# Altium PCB Copy of LED_EN_Kian_V2_F1.PcbDoc
Units mil, origin at the board's own origin, x right, y up, seen from the top; angles counter-clockwise.
Board outline 1770 x 2960 mil, 2 copper layers (Top Layer, Bottom Layer); 36 components, 17 nets, 89 pads, 125 vias.
Unrouted connection lines stored in the file: 5.
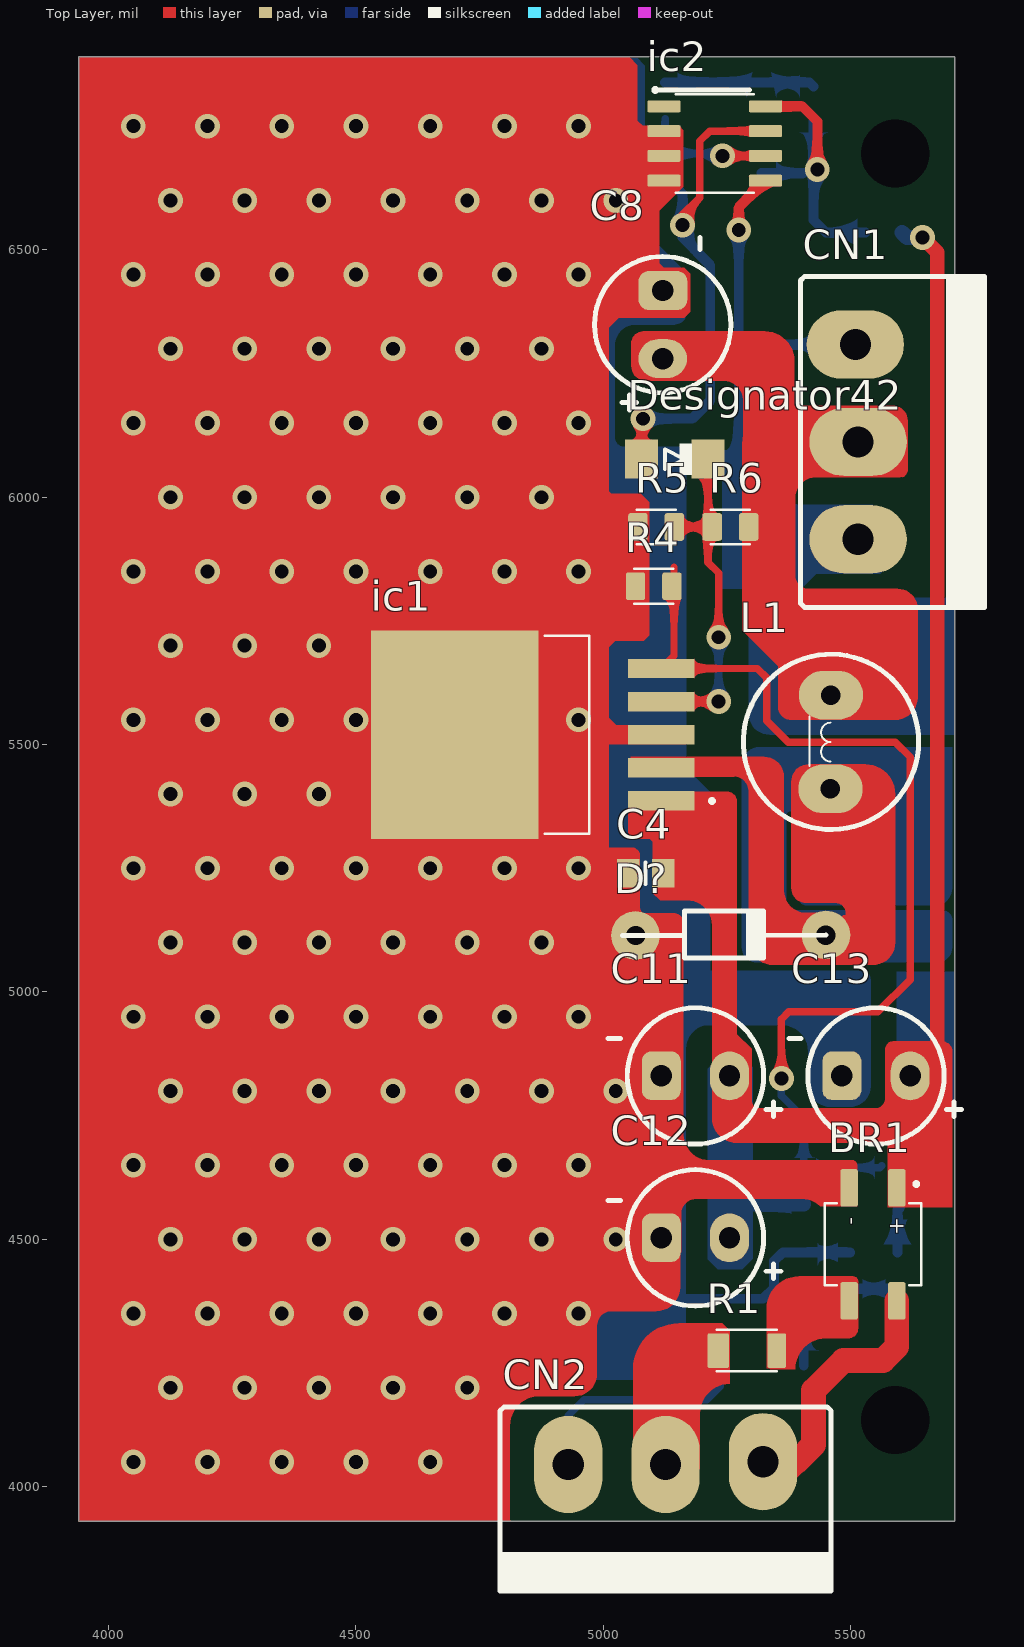
[diagram p0: Top Layer view]
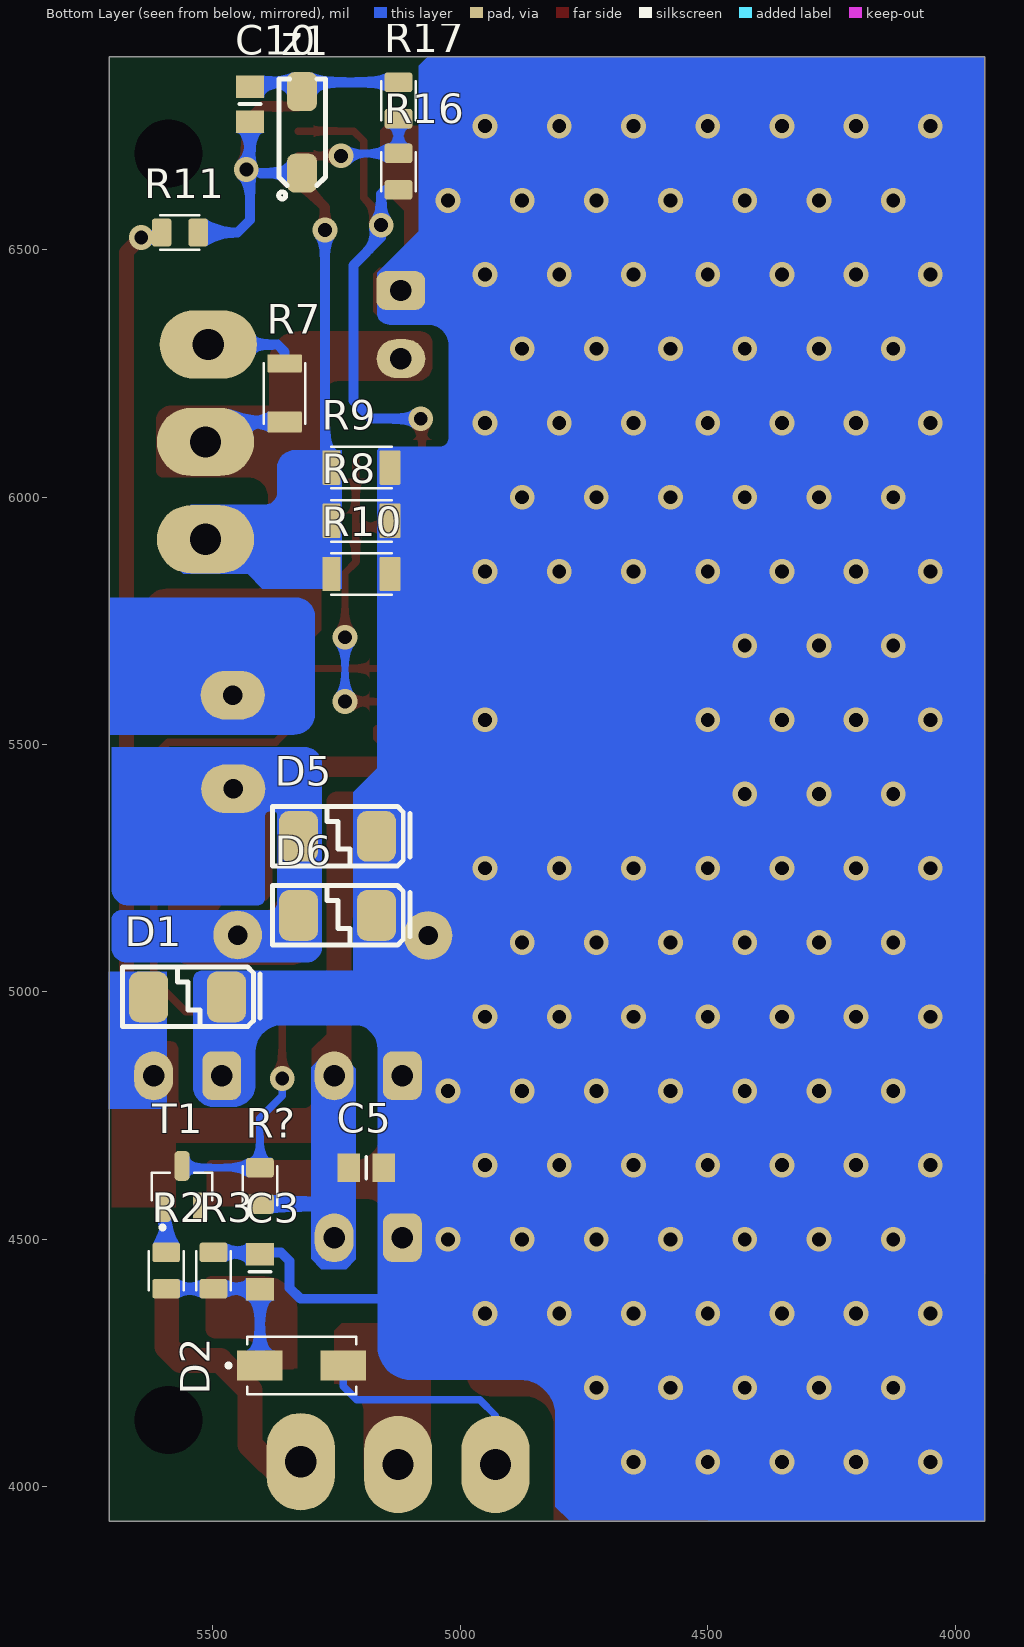
[diagram p1: Bottom Layer view, seen from below]

## Layer stack, top to bottom
Top Solder: solder mask 0.4, Solder Resist, Dk 3.5
Top Layer: signal copper 1.4
Dielectric 1: dielectric 12.6, FR-4, Dk 4.8
Bottom Layer: signal copper 1.4
Bottom Solder: solder mask 0.4, Solder Resist, Dk 3.5

## Board outline
3940,3930 3940,6890 5710,6890 5710,3930

## Design rules (kind name [scope] priority, off if disabled: settings)
Clearance POLY [InNamedPolygon('PG')] p1: gap=50 ignorepadtopadclearanceinfootprint=FALSE
Clearance Clearance_1 [All] p2: gap=10 ignorepadtopadclearanceinfootprint=FALSE except(0: Arc-Hole Track-Hole SMDPad-Hole THPad-Hole Via-Hole Fill-Hole Poly-Hole Region-Hole Text-Hole)
ComponentClearance [All] p1: gap=0 collisioncheckmode=3 verticalgap=0 showdistances=FALSE
PolygonConnect [All] p1: connectstyle=Direct reliefconductorwidth=10 reliefentries=4 polygonreliefangle="90 Angle" airgapwidth=10
RoutingVias [All] p1: holewidth=28 width=50 viastyle="Through Hole" minholewidth=28 minwidth=50 maxholewidth=28 maxwidth=50
SolderMaskExpansion [All] p1: expansion=4
Width [All] p1: maxlimit=196.85 minlimit=10 preferedwidth=10 minimp=50.000000 maximp=50.000000 favimp=50.000000
29 further rules are at their usual default settings.

## Classes and differential pairs
component class U_LED_EN_Kian_V2_SWITCHING: BR1 C3 C4 C5 C8 C10 D1 D2 D? ic1 ic2 L1 R1 R2 R3 R4 R5 R6 R7 R8 R9 R16 R17 R? T1 z1
component class U_LED_EN_Kian_V2_CONECTOR: CN1 CN2

## Components (designator, comment, footprint, x,y, rotation, side; value= is the part's Value field where it differs from the comment)
BR1 "mb6s" MB6S/SMD 5520,4490 r90 top
C3 "1UF" CAP-0805 5404.15,4470.99 r270 bottom
C4 "100nF" CAP-0805 5049.01,5240.85 r0 top
C5 "100nF" CAP-0805 5153.79,4644.15 r0 bottom
C8 "1000uF-10V" CAP-EL-P3.5MM 5120,6417.8 r270 top
C10 "100nF" CAP-0805 5424.15,6830.99 r270 bottom
C11 "1000uF-10V" CAP-EL-P3.5MM 5117.2,4830.39 r0 top (schematic designator C8)
C12 "1000uF-10V" CAP-EL-P3.5MM 5117.2,4503 r0 top (schematic designator C8)
C13 "1000uF-10V" CAP-EL-P3.5MM 5482.2,4830.39 r0 top (schematic designator C8)
CN1 "LED_OUT" CONECTOR/FONIX/3PIN 5515,5915 r90 top
CN2 "INPUT-24-S" CONECTOR/FONIX/3PIN 4928.98,4045 r0 top
D1 "40V" TVS-5V-SMD 5630,4990 r180 bottom
D2 "M7" DIOD/1N4007/SMD 5405.75,4245 r180 bottom
D5 "40V" TVS-5V-SMD 5327,5314.67 r180 bottom (schematic designator D1)
D6 "40V" TVS-5V-SMD 5327,5154.67 r180 bottom (schematic designator D1)
D? "1N5822" DIOD/1N4007/DIP 5450.97,5114.16 r180 top
Designator42 "Comment" mini_melf 5138.62,6075 r180 top
ic1 "lm2576" lm2576 4869.88,5565 r180 top
ic2 "LM358" SOP-8 5240,6710 r0 top
L1 "100uH" inductor-9*12 5459.02,5411.02 r90 top
R1 "1.1R" RES/1206 5290,4270 r0 top
R2 "4.7K" RES/0805 5631.24,4478.21 r270 bottom
R3 "100K" RES/0805 5535.71,4478.21 r270 bottom
R4 "10K" RES/0805 5143.09,5856.75 r180 top
R5 "10K" RES/0805 5065.53,5903.25 r0 top
R6 "10K" RES/0805 5298.09,5976.75 r180 top
R7 "18R" RES/1206 5350,6210 r90 bottom
R8 "0.2R" RES/1206 5200,5957.57 r0 bottom
R9 "0.2R" RES/1206 5200,6065.15 r0 bottom
R10 "0.2R" RES/1206 5200,5850 r0 bottom (schematic designator R8)
R11 "10K" RES/0805 5608.09,6498.25 r180 bottom (schematic designator R5)
R16 "10K" RES/0805 5088.25,6616.91 r90 bottom
R17 "2.2k" RES/0805 5161.75,6843.09 r270 bottom
R? "10K" RES/0805 5368.25,4566.91 r90 bottom
T1 "NPN" SOT23 5600,4564.76 r90 bottom
z1 "12v" DIOD/RS1J 5324.16,6740.75 r90 bottom

## Footprints (in the part's own frame and the unit in brackets; to place one, negate y for a bottom-side part, rotate by r counter-clockwise, add the part's x,y. Pads: shape width x height; smd on the part's side, far side on the other; paste and mask are expansions set on the pad)
CAP-0805 [mm]
  rect 1.15x1.45 smd: 1(0.025,-0.022) 2(1.825,-0.022)
  silkscreen extent 0.93,-0.57 0.93,0.53, body extent -0.17,-0.71 1.84,0.54, height 0.94
CAP-EL-P3.5MM [mm]
  oval 2x2.5 hole 1.1: +(3.5,0)
  rrect50% 2x2.5 hole 1.1: -(0,0.01)
  silkscreen extent -2.73,-3.5 6.13,3.5, body extent -2.25,-4 5.75,4, height 11.5
CONECTOR/FONIX/3PIN [mm]
  oval 3.5x5 hole 1.6: 1(0,0) 2(5,0) 3(10,0.144)
  silkscreen extent -3.5,-6.5 13.5,2.96, body extent -3.5,-10 13.5,2, height 8.8
DIOD/1N4007/DIP [mm]
  round 2.5 hole 1: A(9.8,0) K(0.025,-0.021)
  silkscreen extent 0.02,-1.26 10.46,1.15
DIOD/1N4007/SMD [mm]
  rect 2.33x1.56 smd: A(4.299,0) K(0.019,0)
  silkscreen extent -1.7,-1.48 4.96,1.48, body extent -0.44,-1.24 4.76,1.49, height 2.6
DIOD/RS1J [mil]
  rrect50% 78.74x60 smd: A(79.25,-4.16) K(-85.75,-4.16)
  silkscreen extent -138,-52 104,43, body extent -91,-57 90,46, height 83
inductor-9*12 [mm]
  oval 2.5x3.3 hole 1: 1(-0.01,0) 2(4.8,-0.025)
  silkscreen extent -2.1,-4.53 6.9,4.47, body extent -2.73,-5.09 7.27,4.91, height 12
lm2576 [mm]
  rect 3.4x1 smd paste-3 mask+0: 1(-6.282,4.543) 2(-6.282,2.843) 3(-6.282,1.143) 4(-6.282,-0.557) 5(-6.282,-2.257)
  rect 8.6x10.7 smd paste-6 mask+0: 6(4.318,1.143)
  silkscreen extent -8.98,-3.94 -0.3,6.22, body extent -7.04,-3.92 7.31,6.24, height 4.65
MB6S/SMD [mm]
  rrect23% 1.91x0.91 smd: +(2.9,-1.86) -(2.9,0.59) F(-2.9,0.59) N(-2.9,-1.86)
  silkscreen extent -2.1,-3.12 3.2,1.85, body extent -3.19,-3 3.51,1.72, height 2.9
mini_melf [mm]
  rect 1.7x2 smd: A(1.557,-0.049) K(-1.843,-0.049)
  silkscreen extent -1.01,-0.84 0.36,0.74, body extent -2.79,-1.31 2.35,1.25, height 2.5
RES/0805 [mm]
  rrect25% 1x1.42 smd: 1(0.113,0.933) 2(1.983,0.933)
  silkscreen extent 0.05,0.04 2.05,1.82, body extent 0,0.28 2,1.53, height 0.6
RES/1206 [mm]
  rrect14% 1.09x1.77 smd: 1(-1.469,0.131)
  rrect14% 0.94x1.77 smd: 2(1.536,0.131)
  silkscreen extent -1.55,-0.93 1.55,1.2, body extent -1.51,-0.64 1.59,0.91, height 0.55
SOP-8 [mm]
  rrect25% 1.71x0.61 smd: 1(-2.986,2.032) 2(-2.986,0.762) 3(-2.986,-0.508) 4(-2.986,-1.778) 5(2.224,-1.778) 6(2.224,-0.508) 7(2.224,0.762) 8(2.224,2.032)
  silkscreen extent -3.53,-2.4 1.62,2.98, body extent -3.38,-2.32 2.62,2.58, height 1.75
SOT23 [mil]
  rrect50% 60x30 smd: 1(0.24,0) 2(0.24,-74.8) 3(83.7,-37.4)
  silkscreen extent -45,-99 70,24, body extent -7,-96 86,19, height 44
TVS-5V-SMD [mm]
  rrect50% 2x2.6 smd: 1(4,0) 2(0,0)
  silkscreen extent -1.33,-1.53 5.72,1.54, body extent -0.66,-1.79 4.74,1.83, height 2.43

## Part data
BR1: library part "BRIDGE RECTIFIERS/SMD"
C3 C4 C5 C10: library part cap_smd
C8 C11 C12 C13: library part cap-electrolit
CN1 CN2: library part CONECTOR/FONIX/3PIN
D1 D5 D6: library part TVS-SMD
D2 D?: library part DIOD/RECTIFIERS
L1: library part inductor
R1 R2 R3 R4 R5 R6 R7 R8 R9 R10 R11 R16 R17 R?: library part RES/SMD
z1: library part zener-0.5w

## Free pads (board coordinates)
  round 60 hole 137.8: 13(5590,4135) 13(5590,6695)

## Via types
v1: diameter 50, hole 28, Top Layer to Bottom Layer, 125 vias

## Nets (pads, with @x,y where several pads share a name; then routed paths per layer and width w, separated by ;. In a path a pad name is that pad's centre, name@x,y a point inside that pad or via, vN(x,y) a via of type N, cw(c..) or ccw(c..) an arc to the next point about the centre after c; other vN are vias at no path point)
+12: C10.2 ic2.8 R11.2 z1.K | length 614.2
  Top Layer w20: ic2.8 5402.18,6790 5432.5,6759.68 v1(5432.5,6662.5)
  Bottom Layer w20: z1.K 5405,6655 ; C10.2 5425,6560 5450,6535 R11.2
+24: BR1.+ C4.2 C5.2 C11.+ C12.+ C13.+ D1.2 ic1.1 R11.1 R?.1 | length 2271
  Top Layer w30: C13.+ 5675,4885.39 5675,6495 v1(5645,6525)
  Bottom Layer w30: C11.+@5255,4830 5260,4825 5260,4575 ; C12.+@5260,4490 5260,4575 ; R?.1 5263.62,4571.38 5260,4575 ; R11.1 5613.62,6525 v1(5645,6525) ; C13.+ C13.+@5625,4835.39
+LED_G: CN1.3 R7.2 | length 183.9
  Bottom Layer w20: R7.2 5355.15,6294.15 5369.7,6308.7 CN1.3
+LED_OUT: C8.+ CN1.2 L1.2 R6.1 R7.1 | length 176.6
  Bottom Layer w20: R7.1 5474.67,6152.18 CN1.2
-LED_OUT: CN1.1 ic2.5 R8.2 R9.2 R10.2 | length 607.8
  Top Layer w20: v1(5273.6,6540) 5273.6,6586.04 ic2.5
  Bottom Layer w20: R9.2 5273.6,6073.12 v1(5273.6,6540)
AC1: CN2.2 R1.1
AC2: BR1.N CN2.3 | length 523.9
  Top Layer w50: CN2.3 5390.67,4050.67 5425,4085 5425,4195 5485,4255 5565,4255 5593.23,4283.23 BR1.N
EN: ic1.5 R4.1 R?.2 T1.3 | length 2063.4
  Top Layer w15: 5142.74,5858.25 5142.74,5679.39 ic1.5 5311.14,5653.86 5330,5635 5330,5548.46 5373.46,5505 5590,5505 5620,5475 5620,5025 5555,4960 5375,4960 5360,4945 v1(5360,4825)
  Bottom Layer w15: v1(5360,4825) 5360,4790 5405,4745 R?.2 5559.13,4645 T1.3
GND: BR1.- C3.1 C4.1 C5.1 C8.- C10.1 C11.- C12.- C13.- D1.1 D5.1 D6.1 D?.A ic1.3 ic1.6 ic2.2 ic2.3 ic2.4 R3.1 R4.2 R5.1 R8.1 R9.1 R10.1 R17.1 T1.2 z1.A | length 1480.3
  Top Layer w20: 4945,5520 ic1.3 ; 4950,5820 R4.2 5070,5825 R5.1
  Bottom Layer w20: C12.- 5117.2,4419.8 5157,4380 5323,4380 5345,4402 5345,4456 5362.74,4473.74 R3.1 ; R17.1 5416.38,6838.62 C10.1 ; R10.1 R8.1 R9.1
  other v1: 4050,4050 4200,4050 4350,4050 4500,4050 4650,4050 4125,4200 4275,4200 4425,4200 4575,4200 4725,4200 4050,4350 4200,4350 4350,4350 4500,4350 4650,4350 4800,4350 4950,4350 4125,4500 4275,4500 4425,4500 4575,4500 4725,4500 4875,4500 5025,4500 4050,4650 4200,4650 4350,4650 4500,4650 4650,4650 4800,4650 4950,4650 4125,4800 4275,4800 4425,4800 4575,4800 4725,4800 4875,4800 5025,4800 4050,4950 4200,4950 4350,4950 4500,4950 4650,4950 4800,4950 4950,4950 4125,5100 4275,5100 4425,5100 4575,5100 4725,5100 4875,5100 4050,5250 4200,5250 4350,5250 4500,5250 4650,5250 4800,5250 4950,5250 4125,5400 4275,5400 4425,5400 4050,5550 4200,5550 4350,5550 4500,5550 4950,5550 4125,5700 4275,5700 4425,5700 4050,5850 4200,5850 4350,5850 4500,5850 4650,5850 4800,5850 4950,5850 4125,6000 4275,6000 4425,6000 4575,6000 4725,6000 4875,6000 4050,6150 4200,6150 4350,6150 4500,6150 4650,6150 4800,6150 4950,6150 4125,6300 4275,6300 4425,6300 4575,6300 4725,6300 4875,6300 4050,6450 4200,6450 4350,6450 4500,6450 4650,6450 4800,6450 4950,6450 4125,6600 4275,6600 4425,6600 4575,6600 4725,6600 4875,6600 5025,6600 4050,6750 4200,6750 4350,6750 4500,6750 4650,6750 4800,6750 4950,6750
Ic_fb: Designator42.K ic1.4 R5.2 R6.2 | length 682.5
  Top Layer w15: ic1.4 v1(5233.07,5586.93) ; R5.2 R6.2@5211.17,5940 ; Designator42.K R6.2@5211.17,5940 ; v1(5233.07,5716.93) 5233.07,5846.93 5211.17,5868.83 R6.2@5211.17,5940
  Bottom Layer w15: v1(5233.07,5586.93) v1(5233.07,5716.93)
IF: Designator42.A ic2.7 R16.1 | length 1014
  Top Layer w15: Designator42.A 5077.31,6156.06 v1(5080,6158.75) ; v1(5160,6550) 5160,6570 5195,6605 5195,6720 5215,6740 ic2.7
  Bottom Layer w20: v1(5080,6158.75) 5179.75,6158.75 5216,6195 5216,6469 5160,6525 ; R16.1 5151.62,6621.38 5160,6613 v1(5160,6550)
NetBR1_F: BR1.F R1.2
NetC3_2: C3.2 D2.K R2.2 R3.2 | length 344
  Bottom Layer w20: D2.K C3.2 5405.98,4400.12 R3.2 R2.2
NetD3_K: D5.2 D6.2 D?.K ic1.2 L1.1 | length 260.8
  Top Layer w30: L1.1@5443.39,5395 5450,5401.61 L1.1 ; D?.K@5450,5095 D?.K@5450,5145
  Bottom Layer w30: D6.2@5325,5155 5330,5160 D5.2@5330,5315 ; L1.1@5459.02,5384.02 L1.1
Netic2_6: ic2.6 R16.2 R17.2 | length 283.2
  Top Layer w15: v1(5241,6690) ic2.6
  Bottom Layer w15: R17.2 R16.2 5245,6695 5241,6691 v1(5241,6690)
NetR2_1: R2.1 T1.1 | length 93.5
  Bottom Layer w20: R2.1 5594.49,4559.49 T1.1
SIGNAL: CN2.1 D2.A | length 472.7
  Bottom Layer w15: CN2.1 4928.97,4143.97 4961,4176 5209,4176 5236.5,4203.5 D2.A
pads on no net: ic2.1

## Other copper
Top Layer:
  rectangle net GND: 3938,4429 5011,6890
  region net GND: 5078.89,4355 5017,4355 ccw(c5017,4325) 4987,4325 4987,4228 cw(c4942,4228) 4942,4183 4871,4183 ccw(c4871,4123) 4811,4123 4811,3933 4813,3931 4812,3930 3940,3930 3940,4565 4012,4637 4070.66,4578.34 5065,4578.34
  region net GND: 4971,6890 4972,6889 5053,6889 5069,6873 5069,6761.33 5079.33,6751 5153,6751 5162,6742 5162,6628 5113,6579 5113,6473 5122,6464 5164,6464 5176,6452 5176,6375 5164,6363 5031.19,6363 4993,6324.81 5002,6315.81 5002,6021 5016,6007 5076,6007 5093,5990 5093,5721 5082,5710 5024,5710 5011,5697 5011,5554 5026,5539 5171,5539 5176.19,5533.81 5176.19,5510.86 5166.33,5501 5005,5501 4993,5489
  region net GND: 5011,6890
  region net GND: 5154,4471 5157,4474 5157,4551 cw(c5188,4551) 5188,4582 5401,4582 cw(c5401,4527.01) 5438.75,4567 5513,4567 5513,4649.65 ccw(c5502.65,4649.65) 5502.65,4660 5213.71,4660 cw(c5213.71,4711.71) 5162,4711.71 5162,5139.71 ccw(c5142.71,5139.71) 5142.71,5159 5085,5159 cw(c5085,5170) 5074,5170 5074,5275 ccw(c5057,5275) 5057,5292 5004,5292 4973,5261 4973,4380 4998,4355 5107,4355 ccw(c5107,4403) 5155,4403 5155,4479
  region: 4879,6887
  region net +LED_OUT: 5282.3,6123.14 5282.3,6196.68 ccw(c5243.98,6196.68) 5243.98,6235 5087.31,6235 cw(c5087.31,6265.81) 5056.5,6265.81 5056.5,6311.5 cw(c5080,6311.5) 5080,6335 5326.99,6335 cw(c5326.99,6276.09) 5385.9,6276.09 5385.9,6178.09 5388.98,6175 5470,6175
  region net +LED_OUT: 5380.22,5550 cw(c5380.22,5576.93) 5353.28,5576.93 5353.28,5658.69 5280.82,5731.14 5280.82,6108.15 cw(c5357.68,6108.15) 5357.68,6185 5585,6185 cw(c5585,6155) 5615,6155 5615,6055 cw(c5600,6055) 5600,6040 5429.15,6040 ccw(c5429.14,5998.67) 5387.81,5998.67 5387.81,5842.19 ccw(c5415,5842.19) 5415,5815 5595,5815 cw(c5595,5775) 5635,5775 5635,5595 cw(c5590,5595) 5590,5550
  region net NetD3_K: 5460,5460 5415,5460 ccw(c5415,5425) 5380,5425 5380,5210 ccw(c5410,5210) 5410,5180 5470,5180 cw(c5470,5160) 5490,5160 5490,5155 5485,5155 5450,5120 5450,5075 5470,5055 5545,5055 ccw(c5545,5100) 5590,5100 5590,5400 ccw(c5530,5400) 5530,5460
  region net NetD3_K: 5055,5475 5325,5475 cw(c5325,5435) 5365,5435 5365,5205 ccw(c5410,5205) 5410,5160 5455,5160 5490,5125 5470,5105 5470,5055 5342.68,5055 cw(c5342.68,5104.06) 5293.62,5104.06 5293.62,5406.38 ccw(c5265,5406.38) 5265,5435 5055,5435
  region net +24: 5050,5405 5050,5325 ccw(c5065,5325) 5065,5310 5090,5310 cw(c5090,5300) 5100,5300 5100,5200 5115,5185 5170,5185 cw(c5170,5135) 5220,5135 5220,4745 ccw(c5270,4745) 5270,4695 5575,4695 5575,4565 5705,4565 5705,4880 ccw(c5685,4880) 5685,4900 5585,4900 ccw(c5584.99,4885) 5570,4885 5570,4785 cw(c5550.01,4784.99) 5550,4765 5315,4765 cw(c5315,4780) 5300,4780 5300,4885 5270,4915 5270,5385 ccw(c5250,5385) 5250,5405
  region net NetBR1_F: 5335,4240 5337.2,4237.8 5387.8,4237.8 cw(c5450,4237.8) 5450,4300 5495,4300 ccw(c5495,4320) 5515,4320 5515,4415 ccw(c5505,4415) 5505,4425 5395,4425 ccw(c5395,4360) 5330,4360 5330,4240
  region net AC1: 5195,4035 5195,4147.82 cw(c5255,4147.82) 5255,4207.82 5255,4315 5240,4330 5152.2,4330 ccw(c5152.2,4237.8) 5060,4237.8 5060,4015.14 5065.14,4010
Bottom Layer:
  rectangle net +24: 5593,4763 5711,5041
  region net +24: 5267,4873 5253,4859 5225,4859 5211,4845 5211,4460 5231,4440 5281,4440 5301.61,4460.61 5301.61,4847.39 5283,4866
  region net GND: 5179.01,4933 5361,4933 cw(c5361,4880) 5414,4880 5414,4813 ccw(c5459,4813) 5459,4768 5499,4768 ccw(c5499,4809) 5540,4809 5540,5025 ccw(c5522,5025) 5522,5043 5137.54,5043 5119.54,5025
  region net GND: 3940,3929 3940,6890 5066,6890 5084,6872 5084,6538 5168,6454 5168,6373 cw(c5144,6373) 5144,6349 5066,6349 ccw(c5066,6306) 5023,6306 5023,6121 ccw(c5042,6121) 5042,6102 5157.65,6102 cw(c5157.66,6091.66) 5168,6091.65 5168,5452 5216,5404 5216,4934 ccw(c5216,4885) 5167,4885 5167,4283 cw(c5100,4283) 5100,4216 4879,4216 ccw(c4879,4145) 4808,4145 4808,3960 4780,3932
  region net +LED_OUT: 5710.05,5796.93 5331,5797 ccw(c5331,5760) 5294,5760 5294,5562 ccw(c5336,5562) 5336,5520 5694,5520 5708,5520 5708,5534
  region net -LED_OUT: 5240,6095 5335,6095 cw(c5335,6060) 5370,6060 5370,6010 ccw(c5395,6010) 5395,5985 5545,5985 5570,5960 5570,5855 5560,5845 5430,5845 5400,5815 5240,5815
  region net NetD3_K: 5705,5495 5705,5210 cw(c5670,5210) 5670,5175 5410,5175 cw(c5410,5190) 5395,5190 5395,5355 ccw(c5385,5355) 5385,5365 5377,5365 ccw(c5377,5358) 5370,5358 5370,5331.26 5370,5325 5370,5318.74 5370,5180 ccw(c5385,5180) 5385,5165 5685,5165 cw(c5685,5145) 5705,5145 5705,5090 cw(c5675,5090) 5675,5060 5310,5060 cw(c5310,5090) 5280,5090 5280,5460 cw(c5315,5460) 5315,5495

## Silkscreen, mask and mechanical layers (free items; w line width, h text height)
Mechanical 1:
  the board outline again, w10

## Text inside footprints (layer, text, board x,y; h text height)
BR1: Top Overlay "+" at 5580.04,4545.07 h32.04 r270; Top Overlay "-" at 5489.9,4545.1 h32.06 r270